# EAGLE board v1 (EAGLE 9.5.1)
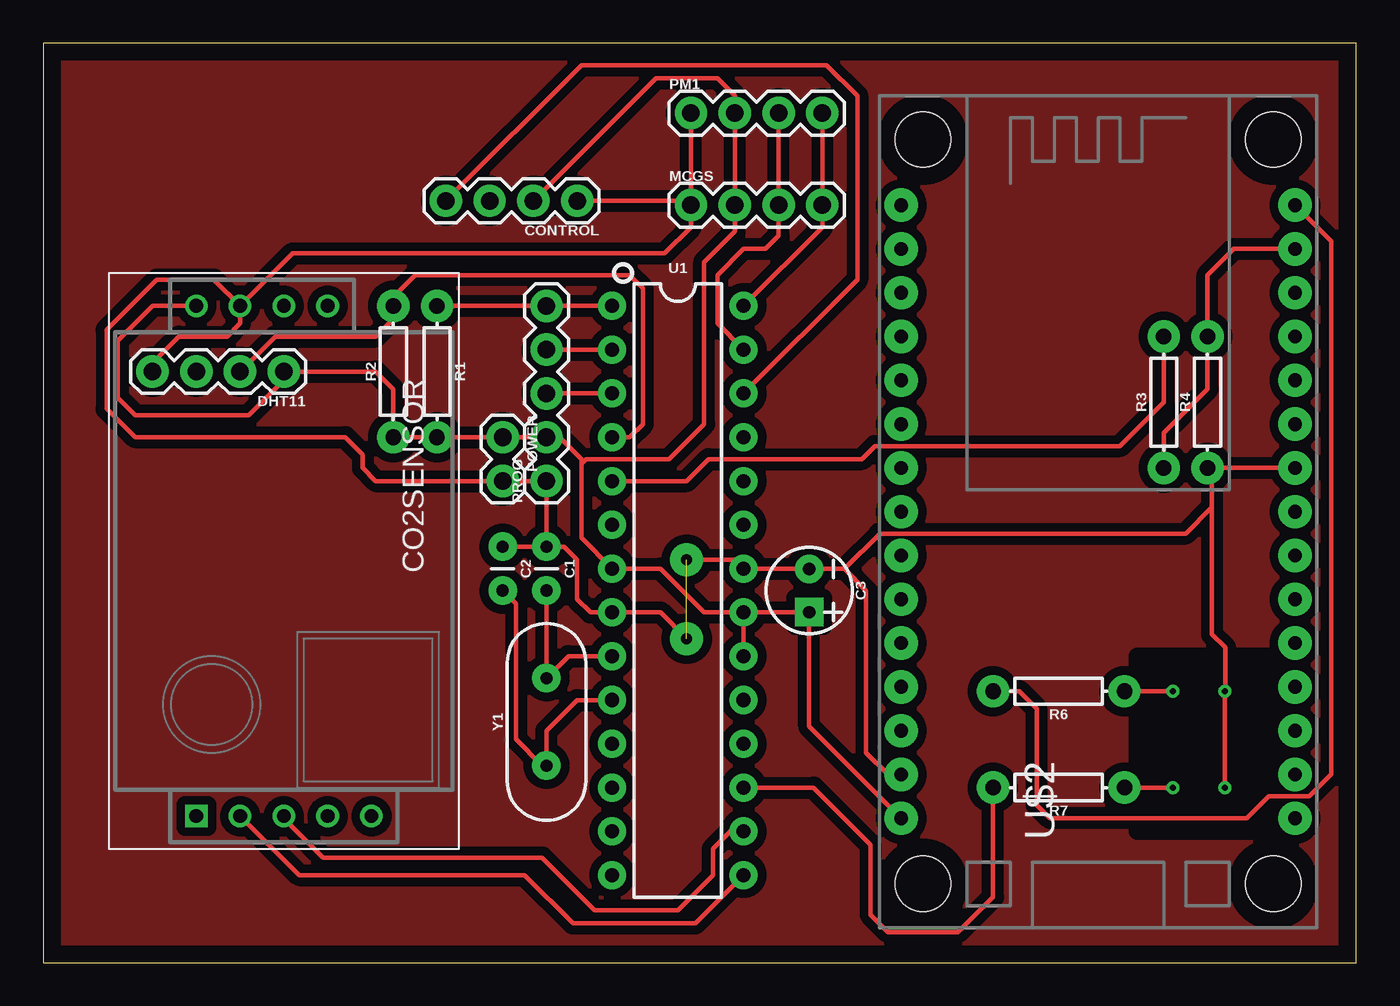
[diagram p0: board, top side]
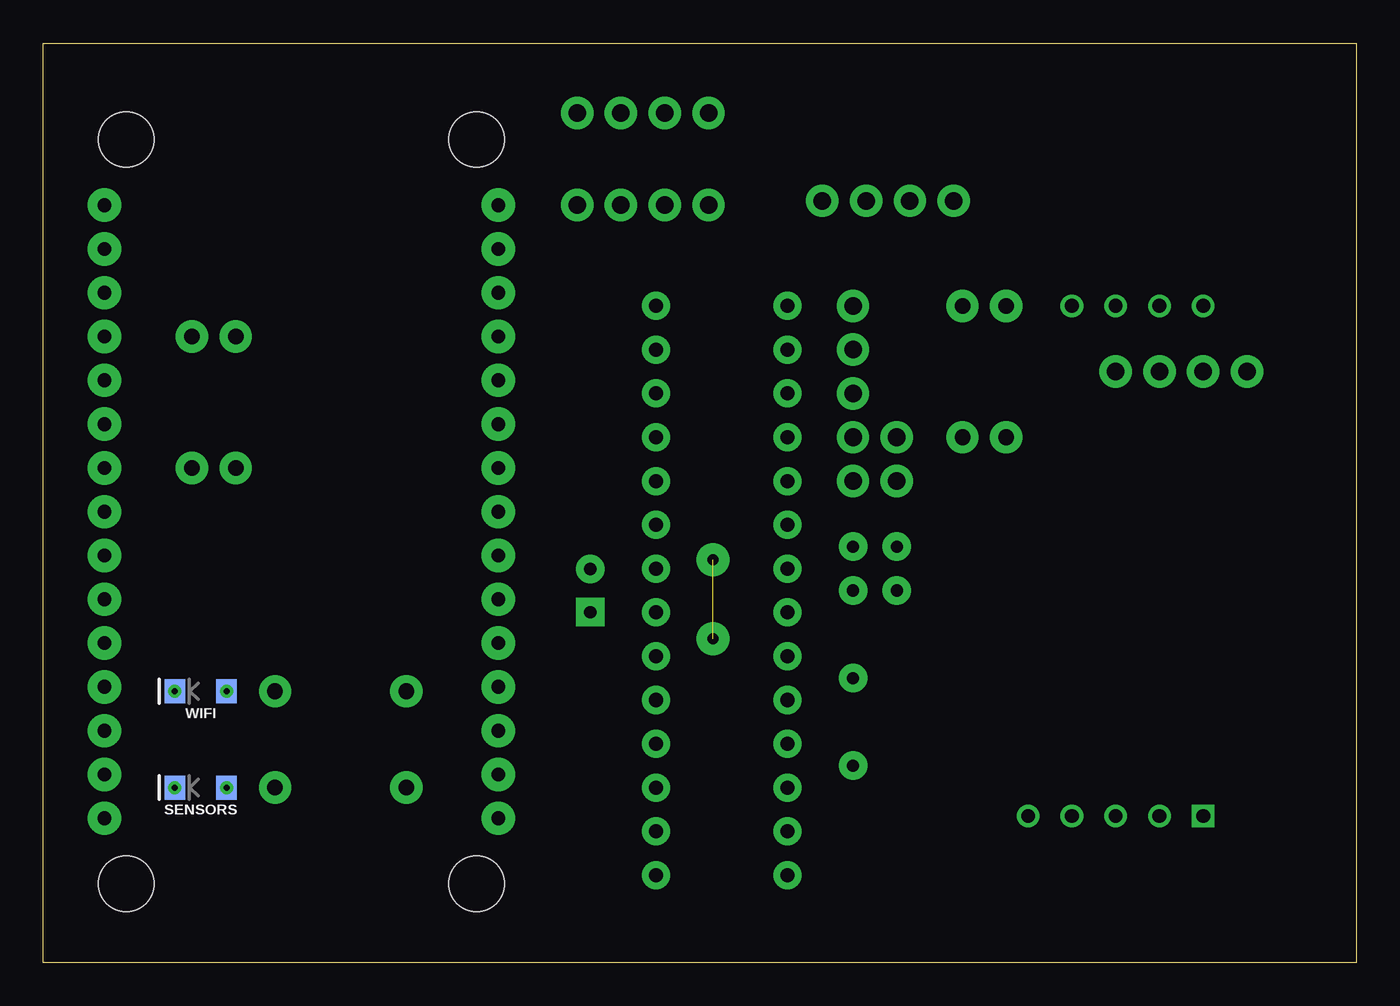
[diagram p1: board, bottom side, seen from below]

Size 76.2 x 53.34 mm. Coordinates in mm from the lower left corner, seen from the top.
Outline: 0,0 76.2,0 76.2,53.34 0,53.33 0,0
Copper layers (1*16): Top 0.035mm / dielectric 1.5mm / Bottom 0.035mm
Design rules "default": minimum track width 6mil, minimum drill 0.35mm, track to track 6mil, track to pad 6mil, pad to pad 6mil, via to via 6mil, smd to smd 6mil, copper to edge 40mil, drill to drill 6mil, minimum pad ring 10mil, minimum via ring 8mil, stop-mask expansion 4mil, vias tented up to drill 0mil, thermal gap 10mil
tRestrict: area 63.5,7.6 to 71.1,17.8

## Footprints (pad centres in the part's own frame; a part is rotated, then mirrored left to right if it is on the bottom)
CAP-PTH-2.54 = drill 0.7 pad 1.651: 1 -1.27,0; 2 1.27,0
CPOL-RADIAL-2.5MM-5MM = drill 0.7 pad 1.651 square: 1 1.25,0 | drill 0.7 pad 1.651: 2 -1.25,0
MH-Z19 = drill 0.8 square: 1 29.591,0 | drill 0.8: 2 29.591,2.54; 3 29.591,5.08; 4 29.591,7.62; 5 29.591,10.16; 6 0,0; 7 0,2.54; 8 0,5.08; 9 0,7.62
1X04 = drill 1.016 pad 1.88: 1 0,0; 2 2.54,0; 3 5.08,0; 4 7.62,0
1X02 = drill 1.016 pad 1.88: 1 0,0; 2 2.54,0
1X05 = drill 1.016 pad 1.88: 1 0,0; 2 2.54,0; 3 5.08,0; 4 7.62,0; 5 10.16,0
AXIAL-0.3 = drill 0.9 pad 1.88: P$1 -3.81,0; P$2 3.81,0
LED-1206 = smd 1.2 x 1.4: A -1.5,0; C 1.5,0
DIP28 = drill 0.813 pad 1.626: 1 -16.51,-3.81; 2 -13.97,-3.81; 3 -11.43,-3.81; 4 -8.89,-3.81; 5 -6.35,-3.81; 6 -3.81,-3.81; 7 -1.27,-3.81; 8 1.27,-3.81; 9 3.81,-3.81; 10 6.35,-3.81; 11 8.89,-3.81; 12 11.43,-3.81; 13 13.97,-3.81; 14 16.51,-3.81; 15 16.51,3.81; 16 13.97,3.81; 17 11.43,3.81; 18 8.89,3.81; 19 6.35,3.81; 20 3.81,3.81; 21 1.27,3.81; 22 -1.27,3.81; 23 -3.81,3.81; 24 -6.35,3.81; 25 -8.89,3.81; 26 -11.43,3.81; 27 -13.97,3.81; 28 -16.51,3.81
ESP12E_DEVKIT = drill 0.8 pad 1.93: 3V3@0 -11.43,-7.62; 3V3@1 11.43,5.08; 3V3@2 11.43,-17.78; AD0 -11.43,17.78; CLK -11.43,-2.54; CMD -11.43,2.54; D0 11.43,17.78; D1 11.43,15.24; D2 11.43,12.7; D3 11.43,10.16; D4 11.43,7.62; D5 11.43,0; D6 11.43,-2.54; D7 11.43,-5.08; D8 11.43,-7.62; EN -11.43,-10.16; GND@0 -11.43,-5.08; GND@1 -11.43,-15.24; GND@2 11.43,2.54; GND@3 11.43,-15.24; RST -11.43,-12.7; RSV@0 -11.43,15.24; RSV@1 -11.43,12.7; RX 11.43,-10.16; SD0 -11.43,0; SD1 -11.43,5.08; SD2 -11.43,7.62; SD3 -11.43,10.16; TX 11.43,-12.7; VIN -11.43,-17.78 | hole 3.2: -10.16,21.59; 10.16,21.59; 10.16,-21.59; -10.16,-21.59
HC49US = drill 0.7 pad 1.651: 1 -2.54,0; 2 2.54,0

## Placement (x,y rotation side)
C1  22pF  [CAP-PTH-2.54]  29.21,22.86 270 top
C2  22pF  [CAP-PTH-2.54]  26.67,22.86 270 top
C3  10uF  [CPOL-RADIAL-2.5MM-5MM]  44.45,21.59 270 top
CO2SENSOR  MH-Z19-CO2-NDIR-SENSOR  [MH-Z19]  8.89,38.1 270 top
CONTROL  [1X04]  30.99,44.2 180 top
DHT11  [1X04]  13.97,34.29 180 top
MCGS  [1X04]  37.59,43.94 0 top
PM1  [1X04]  37.59,49.28 0 top
POWER  [1X02]  26.67,30.48 270 top
PROG  [1X05]  29.21,27.94 90 top
R1  10k  [AXIAL-0.3]  22.86,34.29 270 top
R2  10k  [AXIAL-0.3]  20.32,34.29 90 top
R3  1k  [AXIAL-0.3]  65.02,32.51 90 top
R4  1.8k  [AXIAL-0.3]  67.56,32.51 90 top
R6  1k  [AXIAL-0.3]  58.93,15.75 180 top
R7  1k  [AXIAL-0.3]  58.93,10.16 180 top
SENSORS  [LED-1206]  67.06,10.16 180 bottom
U1  328P  [DIP28]  36.83,21.59 270 top
U$2  ESP12E_DEVKIT  [ESP12E_DEVKIT]  61.21,26.16 0 top
WIFI  [LED-1206]  67.06,15.75 180 bottom
Y1  16MHz  [HC49US]  29.21,13.97 90 top

## Library data of the parts
C1 C2 = SparkFun-Capacitors; PROD_ID: CAP-09128
C3 = SparkFun-Capacitors; PROD_ID: CAP-08440
CO2SENSOR = mh-z19
CONTROL DHT11 MCGS PM1 = SparkFun-Connectors; PROD_ID: CONN-09696
POWER PROG = SparkFun-Connectors
R1-R4 R6 R7 = SparkFun-Resistors; PROD_ID: RES-12183
SENSORS WIFI = SparkFun-LED
U1 = SparkFun-IC-Microcontroller; PROD_ID: IC-09136
U$2 = ESP12E_DEVKIT
Y1 = SparkFun-Clocks; PROD_ID: XTAL-08181; SF_ID: COM-00536

## Nets
5V: C3.1 CO2SENSOR.6 CONTROL.2 DHT11.1 MCGS.2 PM1.2 POWER.1 PROG.2 R1.P$2 R2.P$1 U1.7 U1.20 U1.21 U$2.VIN
GND: C1.1 C2.1 C3.2 CO2SENSOR.7 CONTROL.1 DHT11.4 MCGS.1 PM1.1 POWER.2 PROG.1 R4.P$1 SENSORS.C U1.8 U1.22 U$2.GND@1 U$2.GND@2 WIFI.C
N$1: PROG.4 U1.2
N$2: PROG.5 R1.P$1 U1.1
N$3: PROG.3 U1.3
N$4: C1.2 U1.9 Y1.2
N$5: C2.2 U1.10 Y1.1
N$6: CONTROL.4 U1.26
N$7: DHT11.2 R2.P$2 U1.4
N$8: MCGS.3 PM1.3 U1.27
N$9: MCGS.4 PM1.4 U1.28
N$10: R3.P$2 U1.5
N$12: CO2SENSOR.2 U1.15
N$13: CO2SENSOR.3 U1.16
N$14: R3.P$1 R4.P$2 U$2.D1
N$16: R6.P$2 U$2.D0
N$17: R6.P$1 WIFI.A
N$18: R7.P$2 U1.17
N$19: R7.P$1 SENSORS.A
VO: CO2SENSOR.1

## Tracks (layer width: path | path; a pad name or v marks a point on that pad's centre or on a via)
5V
  Top 0.254: U1.21 U1.20 | 31.24,28.96 31.24,24.64 U1.7 35.81,22.86 38.35,20.32 U1.21 | 31.24,28.96 31.24,29.21 29.97,30.48 PROG.2 POWER.1 R1.P$2 R2.P$1 20.32,33.27 19.3,34.29 DHT11.1 13.97,33.78 11.94,31.75 5.33,31.75 4.32,32.77 4.32,36.07 6.35,38.1 CO2SENSOR.6 | U1.21 40.66,20.34 C3.1 44.45,13.72 U$2.VIN | 31.24,28.96 31.5,29.21 36.32,29.21 38.35,31.24 38.35,40.64 40.13,42.42 MCGS.2 40.13,49.02 PM1.2 40.13,50.29 39.12,51.31 35.56,51.31 CONTROL.2
GND  (via drill 0.35, 0.64 pad 1.91)  (1 unrouted)
  Top 0.254: C2.1 C1.1 | C1.1 PROG.1 POWER.2 19.3,27.94 18.54,28.7 18.54,29.46 17.53,30.48 5.33,30.48 3.68,32.13 3.68,36.7 6.6,39.62 9.91,39.62 CO2SENSOR.7 | C1.1 30.23,24.13 30.99,23.37 30.99,21.08 31.75,20.32 U1.8 35.81,20.32 v37.34,18.8 | DHT11.4 6.35,34.8 7.87,36.32 10.67,36.32 11.43,37.08 CO2SENSOR.7 | 46.5,22.84 C3.2 44.43,22.86 U1.22 40.13,23.37 v37.34,23.37 | 46.5,22.84 47.75,21.59 47.75,12.19 49.02,10.92 U$2.GND@1 | R4.P$1 67.82,28.7 | 67.82,28.7 U$2.GND@2 | 46.5,22.84 48.51,24.85 48.51,24.89 66.29,24.89 67.82,26.42 | 67.82,28.7 67.82,26.42 | SENSORS.C 68.56,15.72 68.58,15.75 | 68.58,15.75 WIFI.C | 67.82,26.42 67.82,19.05 68.58,18.29 68.58,15.75 | CO2SENSOR.7 14.48,41.15 36.07,41.15 37.59,42.67 MCGS.1 | MCGS.1 PM1.1 | CONTROL.1 37.34,44.2 MCGS.1
  other vias: 68.56,10.16 68.56,15.75
N$1
  Top 0.254: PROG.4 U1.2
N$2
  Top 0.254: U1.1 29.46,38.1 PROG.5 R1.P$1
N$3
  Top 0.254: PROG.3 U1.3
N$4
  Top 0.254: U1.9 30.48,17.78 Y1.2 C1.2
N$5
  Top 0.254: U1.10 30.99,15.24 29.21,13.46 Y1.1 28.96,11.43 27.43,12.95 27.43,20.83 C2.2
N$6
  Top 0.254: CONTROL.4 31.24,52.07 45.47,52.07 47.24,50.29 47.24,39.62 U1.26
N$7
  Top 0.254: DHT11.2 13.46,36.32 19.3,36.32 20.32,37.34 20.32,37.85 | 20.32,37.85 R2.P$2 20.32,38.61 21.59,39.88 34.04,39.88 34.8,39.12 34.8,31.24 34.04,30.48 U1.4 | 20.45,37.97 20.32,37.85
N$8
  Top 0.254: U1.27 39.12,37.08 39.12,39.88 40.64,41.4 41.91,41.4 42.67,42.16 MCGS.3 PM1.3
N$9
  Top 0.254: U1.28 45.21,42.67 MCGS.4 PM1.4
N$10
  Top 0.254: U1.5 37.34,27.94 38.61,29.21 47.5,29.21 48.26,29.97 62.48,29.97 65.02,32.51 R3.P$2
N$12
  Top 0.254: CO2SENSOR.2 14.86,5.08 27.94,5.08 30.73,2.29 37.85,2.29 U1.15
N$13
  Top 0.254: CO2SENSOR.3 13.97,8.38 16.26,6.1 28.96,6.1 32,3.05 36.83,3.05 38.86,5.08 38.86,6.6 39.88,7.62 U1.16
N$14
  Top 0.254: R3.P$1 65.02,30.73 67.56,33.27 R4.P$2 67.56,39.88 69.09,41.4 U$2.D1
N$16
  Top 0.254: U$2.D0 74.73,41.86 74.73,10.92 73.46,9.65 71.12,9.65 69.85,8.38 58.42,8.38 57.66,9.14 57.66,14.73 56.64,15.75 R6.P$2
N$17  (via drill 0.35)
  Top 0.254: R6.P$1 WIFI.A
  other vias: 65.56,15.75
N$18
  Top 0.254: U1.17 44.7,10.16 48.01,6.86 48.01,2.79 49.02,1.78 53.09,1.78 55.12,3.81 R7.P$2
N$19  (via drill 0.35)
  Top 0.254: R7.P$1 SENSORS.A
  other vias: 65.56,10.16
NEW
  pour Top (isolate 0.508): 0,53.34 76.2,53.34 76.2,0 0,0